# Altium PCB air qulity monitor with air purifire.PcbDoc
Units mil, origin at the board's own origin, x right, y up, seen from the top; angles counter-clockwise.
Board outline 3850 x 2015 mil, 2 copper layers (Top Layer, Bottom Layer); 35 components, 27 nets, 122 pads, 19 vias.
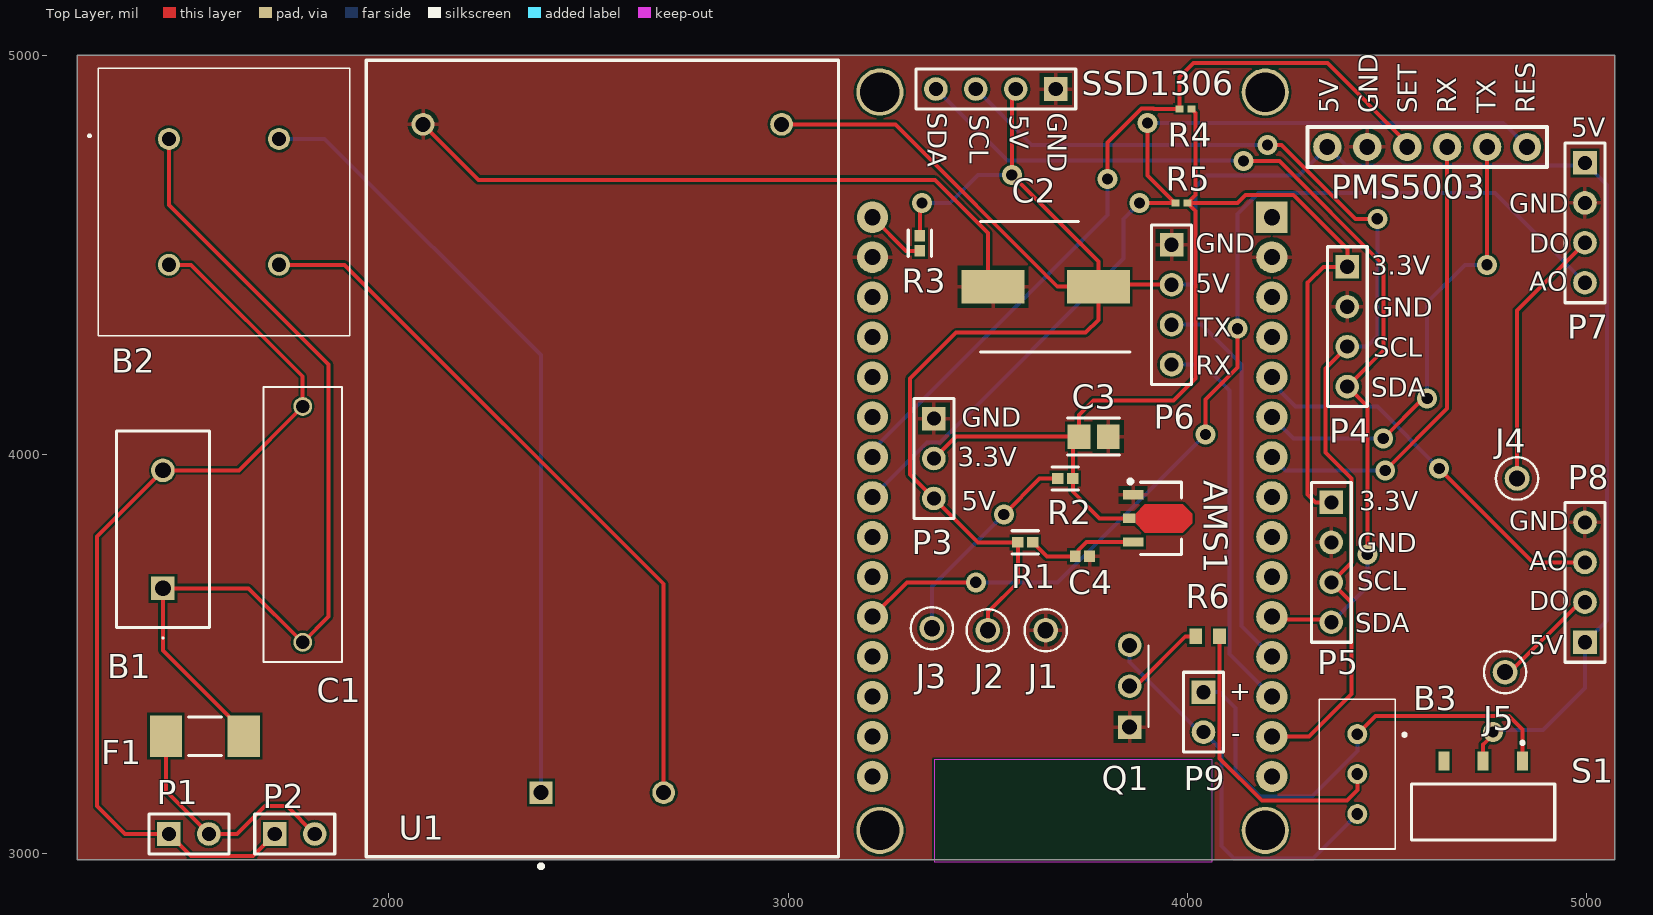
[diagram p0: Top Layer view]
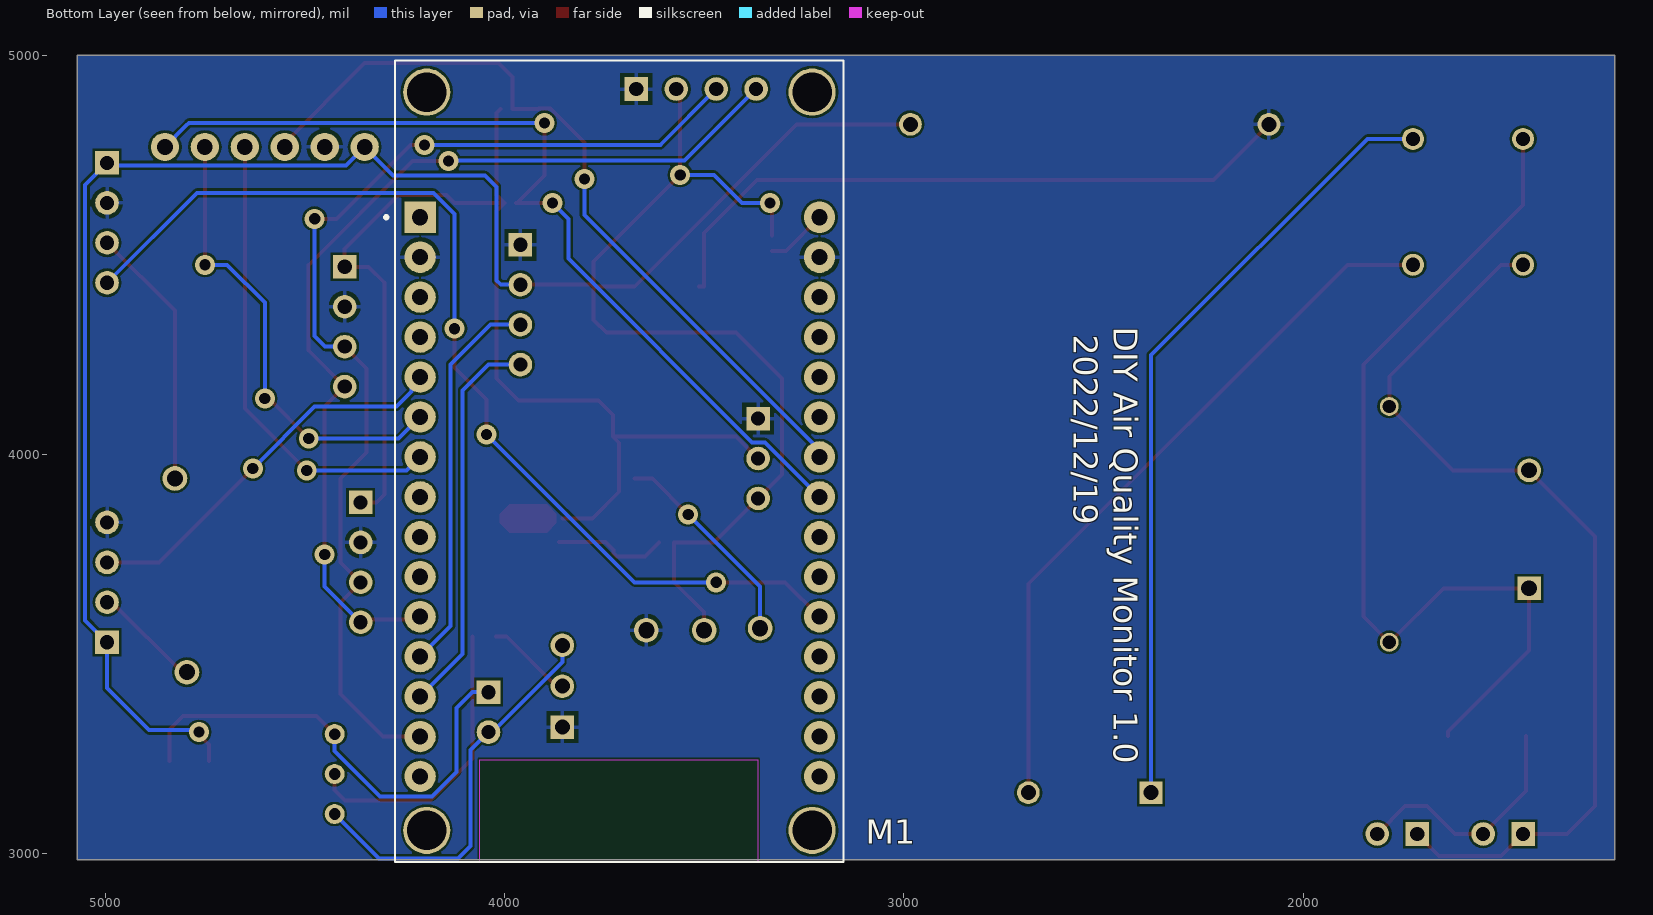
[diagram p1: Bottom Layer view, seen from below]

## Layer stack, top to bottom
Top Solder: solder mask 0.4, Solder Resist, Dk 3.5
Top Layer: signal copper 1.4
Dielectric 1: dielectric 12.6, FR-4, Dk 4.8
Bottom Layer: signal copper 1.4
Bottom Solder: solder mask 0.4, Solder Resist, Dk 3.5

## Board outline
1220,2985 5070,2985 5070,5000 1220,5000

## Design rules (kind name [scope] priority, off if disabled: settings)
Clearance [All] p1: gap=5.98 ignorepadtopadclearanceinfootprint=FALSE
MinimumSolderMaskSliver [All] p1: minsoldermaskwidth=0.98
PolygonConnect [All] p1: connectstyle=Relief reliefconductorwidth=10 reliefentries=4 polygonreliefangle="90 Angle" airgapwidth=10
RoutingVias [All] p1: holewidth=28 width=50 viastyle="Through Hole" minholewidth=28 minwidth=50 maxholewidth=28 maxwidth=50
SilkToSilkClearance [All] p1: silktosilkclearance=1
SilkToSolderMaskClearance [IsPad] p1: minsilkscreentomaskgap=5 clearancetoexposedcopper=TRUE
SolderMaskExpansion [All] p1: expansion=4.02
Width [All] p1: maxlimit=12.01 minlimit=5.98 preferedwidth=10
27 further rules are at their usual default settings.

## Components (designator, comment, footprint, x,y, rotation, side; value= is the part's Value field where it differs from the comment)
AMS1 "IC1" SOT89-150P350X150-3N 3925,3840 r0 top
B1 "10D561K" 10D561K 1435,3665 r90 top
B2 "UU9.8Y-10MH" UU98Y10MH 1450,4789.96 r180 top
B3 "3296X-1-103" 3296X1223LF 4425,3200 r180 top
C1 "0.1uF" MPX-104K275VAC-C-D2 1785,3825 r90 top
C2 "UUR1C221MNL1GS" CAPAE830X1050N 3645,4420 r180 top
C3 "22uF" FP-GRM219-0_2-0_15-IPC_A 3765,4045 r0 top
C4 "10uF" CAPC1005X70N 3736.89,3745 r180 top
F1 "S6125-M2-0.5A" CAPC6125X25N 1540,3295 r0 top
J1 "5004" FP-5004-MFG 3645,3560 r0 top
J2 "5004" FP-5004-MFG 3500,3560 r0 top
J3 "5004" FP-5004-MFG 3360,3565 r0 top
J4 "5004" FP-5004-MFG 4825,3940 r0 top
J5 "5004" FP-5004-MFG 4795,3455 r0 top
M1 "ESP32-WROOM-32" ESP32-DEVKIT-V1 3735,3990 r180 bottom
P1 "AC Current suppy pin Header 2" HDR1X2 1450,3050 r0 top
P2 "uv lamp connect pin Header 2" HDR1X2 1715,3050 r0 top
P3 "Header 3" HDR1X3 3365,4090 r270 top
P4 "Si7021 Sensor Header" HDR1X4 4400,4470 r270 top
P5 "SGP30 Sensor Header" HDR1X4 4360,3880 r270 top
P6 "ZE08-CH2O sensor Header" HDR1X4 3960,4525 r270 top
P7 "MQ7 sensor Header" HDR1X4 4995,4730 r270 top
P8 "MQ131 sensor Header" HDR1X4 4995,3530 r90 top
P9 "5V FAN Header 2" HDR1X2 4040,3405 r270 top
PMS5003 "PMS5003 PM2.5 Sensor" "PMS5003 PM2.5 Sensor" 4600,4770 r90 top (schematic designator "PMS5003 PM2.5 Sensor")
Q1 "2SC1384-TA" 2SC1384-TA 3855,3317.64 r90 top
R1 "0R" FP-RC0402-0_4-IPC_A 3593.84,3780 r0 top
R2 "0R" FP-RC0402-0_4-IPC_A 3693.84,3940 r180 top
R3 "0R" FP-RC0402-0_4-IPC_A 3330,4528.84 r270 top
R4 "10kΩ" RESC1005X40X25LL05T10 3995,4865 r0 top value=10kO
R5 "10kΩ" RESC1005X40X25LL05T10 3984.76,4630 r0 top value=10kO
R6 "RC0603FR-073K3L" RESC1608X55X25ML10T15 4050.47,3545 r0 top
S1 "SK-3245S-L1-A" SK3245SL1A 4740,3105 r180 top
SSD1306 "Display" HDR1X4 3670,4915 r180 top
U1 "HLK-10M05" FP-HLK-10M05-MFG 2535,3990 r90 top

## Footprints (in the part's own frame and the unit in brackets; to place one, negate y for a bottom-side part, rotate by r counter-clockwise, add the part's x,y. Pads: shape width x height; smd on the part's side, far side on the other; paste and mask are expansions set on the pad)
2SC1384-TA [mm]
  rect 1.493x1.493 hole 0.96: 1(0,0)
  round 1.493 hole 0.96: 2(2.6,0) 3(5.2,0)
  silkscreen extent 0,-1.2 5.2,-1.2
10D561K [mm]
  rect 1.5x1.5 hole 1: 1(0,0)
  round 1.5 hole 1: 2(7.5,0)
  silkscreen extent -3.2,-2.95 10,2.95, body extent -2.5,-2.95 10,2.95, height 15.6
3296X1223LF [mm]
  round 1.269 hole 0.74: 1(0,-2.54) 2(0,0) 3(0,2.54)
  silkscreen extent -3.1,-4.76 2.41,4.76, body extent -2.03,-4.83 2.8,6.22, height 10.03
CAPAE830X1050N [mm]
  rect 4x2.15 smd: 1(-3.35,0) 2(3.35,0)
  silkscreen extent -5.35,-4.15 4.15,4.15, body extent -4.65,-4.32 4.65,4.18, height 10.5
CAPC1005X70N [mm]
  rect 0.69x0.72 smd: 1(-0.46,0) 2(0.46,0)
  body extent -0.5,-0.25 0.5,0.25, height 0.7
CAPC6125X25N [mm] "Chip Capacitor, 2-Leads, Body 6.10x2.50mm, IPC Medium Density"
  rect 2.05x2.65 smd: 1(-2.475,0) 2(2.475,0)
  silkscreen extent -1.05,-1.22 1.05,1.23, body extent -3.15,-1.3 3.15,1.3, height 2.5
ESP32-DEVKIT-V1 [mm]
  rect 2x2 hole 1.02: 1(-12.098,15.341)
  round 2 hole 1.02: 2(-12.098,12.801) 3(-12.098,10.261) 4(-12.098,7.721) 5(-12.098,5.181) 6(-12.098,2.641) 7(-12.098,0.101) 8(-12.098,-2.439) 9(-12.098,-4.979) 10(-12.098,-7.519) 11(-12.098,-10.059) 12(-12.098,-12.599) 13(-12.098,-15.139) 14(-12.098,-17.679) 15(-12.098,-20.219) 16(13.302,-20.219) 17(13.302,-17.679) 18(13.302,-15.139) 19(13.302,-12.599) 20(13.302,-10.059) 21(13.302,-7.519) 22(13.302,-4.979) 23(13.302,-2.439) 24(13.302,0.101) 25(13.302,2.641) 26(13.302,5.181) 27(13.302,7.721) 28(13.302,10.261) 29(13.302,12.801) 30(13.302,15.341)
  round 3 hole 2.517 unplated: ""(-11.678,-23.649) ""(-11.678,23.301) ""(12.832,-23.649) ""(12.832,23.301)
  Keep-Out Layer region: 9.382,-25.649 -8.308,-25.649 -8.308,-19.159 9.382,-19.159
  Keep-Out Layer region: 9.382,-25.649 -8.308,-25.649 -8.308,-19.159 9.382,-19.159
  Keep-Out Layer region: 9.382,-25.649 -8.308,-25.649 -8.308,-19.159 9.382,-19.159
  silkscreen extent -14.35,-25.65 14.83,25.3, body extent -13.5,-25.63 15,25.3, height 7.2
FP-5004-MFG [mm]
  round 1.57 hole 1.02 paste-1000 mask+0: 1(0,0)
  silkscreen extent -1.35,-1.34 1.35,1.34, body extent -1.45,-1.45 1.45,1.45, height 0.25
FP-GRM219-0_2-0_15-IPC_A [mil]
  rect 57.27x61.27 smd paste+0 mask+0: 1(-36.45,0) 2(36.45,0)
  silkscreen extent -65,-46 65,46, body extent -85,-50 85,50, height 10
FP-HLK-10M05-MFG [mm]
  rect 1.45x1.45 hole 0.95 paste-1000 mask+0: 1(-21.25,3.9)
  round 1.45 hole 0.95 paste-1000 mask+0: 2(-21.25,-3.9) 3(21.25,11.4) 4(21.25,-11.4)
  silkscreen extent -26.05,-15.01 25.33,15.01, body extent -25.43,-15.11 25.43,15.11, height 0.25
FP-RC0402-0_4-IPC_A [mil]
  rect 28.16x26.48 smd paste+0 mask+0: 1(-18.84,0) 2(18.84,0)
  silkscreen extent -33,-29 33,29, body extent -41,-21 41,21, height 10
HDR1X2 [mm] "Connector; Header; 2 Position"
  rect 1.5x1.5 hole 0.9: 1(0,0)
  round 1.5 hole 0.9: 2(2.54,0)
  silkscreen extent -1.27,-1.27 3.81,1.27
HDR1X3 [mm] "Connector; Header; 3 Position"
  rect 1.5x1.5 hole 0.9: 1(0,0)
  round 1.5 hole 0.9: 2(2.54,0) 3(5.08,0)
  silkscreen extent -1.27,-1.27 6.35,1.27
HDR1X4 [mm] "Connector; Header; 4 Position"
  rect 1.5x1.5 hole 0.9: 1(0,0)
  round 1.5 hole 0.9: 2(2.54,0) 3(5.08,0) 4(7.62,0)
  silkscreen extent -1.27,-1.27 8.89,1.27
MPX-104K275VAC-C-D2 [mm]
  round 1.2 hole 0.85: 1(-7.5,0) 2(7.5,0)
  silkscreen extent -8.75,-2.5 8.75,2.5, body extent -8.75,-2.5 8.75,2.5, height 12
"PMS5003 PM2.5 Sensor" [mm] "PMS5003 PM2.5 Sensor"
  round 1.8 hole 1: GND(0,3.81) RESET(0,-6.35) RX(0,-1.27) SET(0,1.27) TX(0,-3.81) VCC(0,6.35)
  silkscreen extent -1.27,-7.62 1.27,7.62, body extent -1.27,-7.62 1.27,7.62, height 8.5
RESC1005X40X25LL05T10 [mm] "Chip Resistor, 2-Leads, Body 1.00x0.50mm, IPC High Density"
  rect 0.5x0.45 smd: 1(-0.375,0) 2(0.375,0)
  body extent -0.53,-0.27 0.53,0.28, height 0.4
RESC1608X55X25ML10T15 [mm] "Chip Resistor, 2-Leads, Body 1.60x0.80mm, IPC Low Density"
  rect 0.8x1 smd: 1(-0.75,0) 2(0.75,0)
  body extent -0.85,-0.45 0.85,0.45, height 0.55
SK3245SL1A [mm]
  rect 0.7x1.2 smd: 1(-2.5,-3.25) 2(0,-3.25) 3(2.5,-3.25)
  silkscreen extent -4.55,-4.5 4.55,1.78, body extent -4.55,-3.62 4.55,3.88, height 3.2
SOT89-150P350X150-3N [mm] "SOT89, 3-Leads, Body 4.50x2.50mm, Pitch 1.50mm, Lead Span 3.5mm, IPC Medium Density"
  rect 1.3x0.6 smd: 1(-1.55,1.5) 3(-1.55,-1.5)
  rect 0.8x0.6 smd: 2(-1.8,0)
  Top Layer region: -1.4,0.3 -0.8,0.9 1.6,0.9 2.2,0.3 2.2,-0.3 1.6,-0.9 -0.8,-0.9 -1.4,-0.3
  silkscreen extent -1.85,-2.3 1.53,2.47, body extent -2.02,-2.27 2.22,2.27, height 1.5
UU98Y10MH [mm]
  round 1.4 hole 0.9: 1(0,0) 2(-7,0) 3(-7,8) 4(0,8)
  silkscreen extent -11.5,-4.5 5.1,12.5, body extent -11.5,-4.5 4.5,12.5, height 14.1

## Part data
AMS1: library part IC?, "75dB@(120Hz) 1A 1.25V@(1A) ±125?@(Tj) Fixed 3.3V~3.3V Positive 1 20V SOT-89 Linear Voltage Regulators (LDO) ROHS", LCSC Part #=C2904742, Manufacturer=YONGYUTAI, Mfr. Part #=AMS1117-3.3, Package=SOT-89, Datasheet=https://datasheet.lcsc.com/lcsc/2110121330_YONGYUTAI-AMS1117-3-3_C2904742.pdf
B1: "920V 42.3J 180pF@1kHz 460V 350V 504V~616V 2.5kA Plugin Varistors ROHS", LCSC Part #=C113236, Manufacturer="Hongzhi Elec", Package=Plugin, Datasheet=https://datasheet.lcsc.com/lcsc/1811141751_Hongzhi-Elec-10D561K_C113236.pdf, Mfr. Part #=10D561K
B2: "Common Mode Chokes / Filters Power Line 10mH @ 1kHz 500mA Through Hole RoHS", Manufacturer_Name="Guangdong Fenghua Advanced Tech", Datasheet Link=https://datasheet.lcsc.com/szlcsc/Guangdong-Fenghua-Advanced-Tech-UU9-8Y-10mH_C75192.pdf, Geometry.Height=14mm, Manufacturer_Part_Number=UU9.8Y-10MH
B3: "3296X side adj cermet trimmer,10K 10mm", Manufacturer_Name=Bourns, Mouser Part Number=652-3296X-1-103, Arrow Part Number=3296X-1-103, Arrow Price/Stock=https://www.arrow.com/en/products/3296x-1-103/bourns, Datasheet Link=https://componentsearchengine.com/Datasheets/1/3296X-1-103.pdf, Geometry.Height=10mm, Manufacturer_Part_Number=3296X-1-103, Mouser Price/Stock=https://www.mouser.co.uk/ProductDetail/Bourns/3296X-1-103?qs=1WK3E8%252B1vGCDWmrofBGMvw%3D%3D
C1: library part MPX-104K275VAC-C-D2, "0.1uF ±10% -40?~+110? X2 275VAC Radial Leaded,P=15mm Suppression Capacitors ROHS", LCSC Part #=C3249976, Manufacturer=CORETONG, Package="Radial Leaded,P=15mm", Datasheet=https://datasheet.lcsc.com/lcsc/2207051802_CORETONG-MPX-104K275VAC-C-D2_C3249976.pdf, Mfr. Part #=MPX-104K275VAC-C-D2
C2: "Nichicon 220uF 16V dc Aluminium Electrolytic Capacitor, Surface Mount 8 (Dia.) x 10mm +85C 8mm", Manufacturer_Name=Nichicon, Mouser Part Number=647-UUR1C221MNL1GS, Arrow Part Number=UUR1C221MNL1GS, Arrow Price/Stock=https://www.arrow.com/en/products/uur1c221mnl1gs/nichicon, Datasheet Link=http://www.nichicon.co.jp/english/products/pdfs/e-uur.pdf, Geometry.Height=10.5mm, Manufacturer_Part_Number=UUR1C221MNL1GS, Mouser Price/Stock=https://www.mouser.co.uk/ProductDetail/Nichicon/UUR1C221MNL1GS?qs=%252BzEQ4sV6YNnDp6ENSFi1fw%3D%3D
C3: library part CMP-06035-056251-1, "Chip Multilayer Ceramic Capacitors for General Purpose, 0805, 22uF, X5R, 15%, 20%, 16V", LCSC Part #=C162295, Manufacturer="Murata Electronics", Mfr. Part #=GRM219R61C226ME15L, Package=0805, Datasheet=https://datasheet.lcsc.com/lcsc/1811141821_Murata-Electronics-GRM219R61C226ME15L_C162295.pdf
C4: library part CL05A106MQ5NUNC, "6.3V 10uF X5R ±20% 0402 Multilayer Ceramic Capacitors MLCC - SMD/SMT ROHS", LCSC Part #=C15525, Manufacturer="Samsung Electro-Mechanics", Package=0402, Datasheet Link=https://datasheet.datasheetarchive.com/originals/distributors/Datasheets-DGA10/2406160.pdf, Mfr. Part #=CL05A106MQ5NUNC
F1: "SMD Fuses ROHS", LCSC Part #=C845172, Manufacturer="SART(Nanjing Sart Tech)", Package=SMD, Datasheet=https://datasheet.lcsc.com/lcsc/2201242130_SART-Nanjing-Sart-Tech-S6125-M2-0-5A_C845172.pdf, Mfr. Part #=S6125-M2-0.5A
J1 J2 J3 J4 J5: library part CMP-2000-05575-2, "PC TEST POINT MINIATURE YELLOW", LCSC Part #=C2906762, Manufacturer=Keystone, ComponentLink2Description=Datasheet, ComponentLink2URL=https://www.keyelco.com/product-pdf.cfm?p=1313, Datasheet=https://datasheet.lcsc.com/lcsc/2201121200_Keystone-5004_C2906762.pdf, Mfr. Part #=5004, Package=5004
M1: library part ESP32-DEVKIT-V1, "Dual core, Wi-Fi: 2.4 GHz up to 150 Mbits/s,BLE (Bluetooth Low Energy) and legacy Bluetooth, 32 bits, Up to 240 MHz"
P1 P2 P9: library part "Header 2", "Header, 2-Pin", LatestRevisionDate=17-Jul-2002, LatestRevisionNote="Re-released for DXP Platform.", Publisher="Altium Limited"
P3: "Header, 3-Pin", LatestRevisionDate=17-Jul-2002, LatestRevisionNote="Re-released for DXP Platform.", Publisher="Altium Limited"
P4 P5 P6 P7 P8 SSD1306: library part "Header 4", "Header, 4-Pin", LatestRevisionDate=17-Jul-2002, LatestRevisionNote="Re-released for DXP Platform.", Publisher="Altium Limited"
Q1: "Bipolar Transistors - BJT NPN Si Transistor Epitaxial", LCSC Part #=C2910422, Manufacturer="Jiangsu Changjing Electronics Technology Co., Ltd.", Datasheet=https://datasheet.lcsc.com/lcsc/2204131745_Jiangsu-Changjing-Electronics-Technology-Co---Ltd--2SC1384-TA_C2910422.pdf, Geometry.Height=5.33mm, Mfr. Part #=2SC1384-TA
R1 R2 R3: library part CMP-2002-07342-2, "RES SMD 0 OHM JUMPER 1/16W 0402", LCSC Part #=C106231, Manufacturer=Yageo, Mfr. Part #=RC0402FR-070RL, Package=0402, Datasheet=https://www.lcsc.com/product-detail/Chip-Resistor-Surface-Mount_YAGEO-RC0402FR-070RL_C106231.html
R4 R5: library part CMP-2002-07353-1, "62.5mW 50V ±100ppm/? ±1% -55?~+155? 10kO 0402 Chip Resistor - Surface Mount ROHS", LCSC Part #=C60490, Manufacturer="Yageo / Phycomp", Mfr. Part #=RC0402FR-0710KL, Package=0402, Datasheet=https://datasheet.lcsc.com/lcsc/1809301715_YAGEO-RC0402FR-0710KL_C60490.pdf
R6: library part CMP-1012-00567-2, "Chip Resistor, 3.3 KOhm, +/- 1%, 0.1 W, -55 to 155 degC, 0603 (1608 Metric), RoHS, Tape and Reel", Case/Package=0603, Case Code (Metric)=1608, Manufacturer=Yageo, Max Operating Temperature=155degC, Max Power Dissipation=100mW, Min Operating Temperature=-55degC, Package Description="2-Pin Surface Mount Device, Body 1.6 x 0.8 mm", Package Quantity=1, Resistance=3.3KOhm, Temperature Coefficient=100ppm/degreesC, Tolerance=1%, Voltage Rating=50V, Case Code (Imperial)=0603, Composition=ThickFilm, Datasheet URL=http://www.yageo.com/NewPortal/yageodocoutput?fileName=/pdf/R-Chip/PYu-RC_Group_51_RoHS_L_5.pdf, Datasheet Version="Rev. 5, 10/2016", Depth=0.8mm, Height=0.45mm, Lead Free=LeadFree, Length=1.6mm, Manufacturer URL=http://www.yageo.com/, Military Standard=Not, Number of Pins=2, Number of Terminations=2, Package Reference=0603, Packaging=TapeandReel, Power Rating=100mW, REACH SVHC=NoSVHC, RoHSCompliant=true, Termination=SMD/SMT, Voltage Rating (DC)=50V, Width=0.8mm
S1: "Toggle switch, horizontal stick two gears 3 feet, double row of high temperature salt fog resistance 24 hours,9.0x3.5x3.2, black handle height 2.0mm", Manufacturer_Name="XKB Connectivity", Datasheet Link=http://www.helloxkb.com/public/images/pdf/SK-3245S-X-X.pdf, Geometry.Height=3.65mm, Manufacturer_Part_Number=SK-3245S-L1-A
U1: library part CMP-218581-000001-1, "10W Ultra-Compact Power Module"

## Via types
v1: diameter 50, hole 28, Top Layer to Bottom Layer, 19 vias

## Nets (pads, with @x,y where several pads share a name; then routed paths per layer and width w, separated by ;. In a path a pad name is that pad's centre, name@x,y a point inside that pad or via, vN(x,y) a via of type N, cw(c..) or ccw(c..) an arc to the next point about the centre after c; other vN are vias at no path point)
3.3V: AMS1.2 C3.1 P3.2 P4.1 P5.1 R2.1 R4.2 R5.2 | length 3003.3
  Top Layer w10: P3.2 3420,4045 C3.1 ; AMS1.2 3780,3840 3712.68,3907.32 R2.1 3712.68,4029.13 C3.1 ; R4.2 4020,4854.76 4020,4649.49 R5.2@4000.51,4630 ; P5.1 4320,3880 4300,3900 4300,4430 4340,4470 P4.1 4400,4515 4265,4650 4145,4650 4125,4630 R5.2@4000.51,4630 ; C3.1 3728.55,4098.55 3765,4135 3965,4135 4020,4190 4019.76,4190 4019.76,4609.76 R5.2 R5.2@4000.51,4630
5V: C2.1 J2.1 P3.3 P6.2 P7.1 P8.1 PMS5003.VCC R1.1 R3.1 S1.2 SSD1306.2 U1.4 | length 6576.7
  Top Layer w10: U1.4 3268.39,4826.61 3675,4420 C2.1 ; R3.1 3330,4625 v1(3335,4630) ; J2.1 3500.91,3560.91 3500.91,3605.91 3575,3680 R1.1 3475,3780 P3.3 3305,3950 3305,4190 3420,4305 3745,4305 3776.89,4336.89 C2.1 ; SSD1306.2 3560,4905 v1(3560,4700) 3776.89,4483.11 C2.1 ; P6.2 3781.89,4425 C2.1 ; S1.2 4740,3273.43 4765,3298.43 v1(4765,3305)
  Bottom Layer w10: v1(3335,4630) 3405,4630 3475,4700 v1(3560,4700) ; P6.2 4008.83,4425 4020,4436.17 4020,4670 4049.02,4699.02 4279.02,4699.02 PMS5003.VCC 4396.42,4723.58 4988.58,4723.58 P7.1 5050,4675 5050,3585 P8.1 4995,3415 4890,3310 4770,3310 v1(4765,3305)
DOUT1: J4.1 P7.3 | length 660.4
  Top Layer w10: J4.1 4825,4360 P7.3
DOUT2: J5.1 P8.2 | length 272.5
  Top Layer w10: J5.1 4807.5,3455 4982.5,3630 P8.2
GND: AMS1.1 C2.2 C3.2 C4.1 J1.1 M1.2 M1.29 P3.1 P4.2 P5.2 P6.1 P7.2 P8.4 PMS5003.GND Q1.1 SSD1306.1 U1.3 | length 1674.4
  Top Layer w10: U1.3 2225.33,4687.46 3367.54,4687.46 3500,4555 3500,4420 C2.2
NetAMS1_3: AMS1.3 C4.2 R1.2 | length 284.8
  Top Layer w10: R1.2 3613.53,3780 3648.53,3745 C4.2 3727.36,3753.58 3727.36,3760.65 3747.66,3780.94 AMS1.3
NetB1_1: B1.1 B2.1 C1.1 F1.2 | length 2312.7
  Top Layer w10: B2.1 1450,4625 1850,4225 1850,3594.72 C1.1 1649.72,3665 B1.1 1435,3509.25 1637.44,3306.81 F1.2
NetB1_2: B1.2 B2.4 C1.2 P1.1 P2.1 | length 2370.2
  Top Layer w10: B2.4 1505,4475 1785,4195 C1.2 1625,3960.28 B1.2 1270,3795.28 1270,3120 1340,3050 P1.1 1505,2995 1660,2995 P2.1
NetB2_2: B2.2 U1.1 | length 1975.3
  Bottom Layer w10: B2.2 1840.04,4789.96 2381.46,4248.54 U1.1
NetB2_3: B2.3 U1.2 | length 1816.8
  Top Layer w10: B2.3 1890,4475 2688.54,3676.46 U1.2
NetB3_1: B3.1 P9.1 S1.1 | length 1201.1
  Top Layer w10: B3.1 4470,3345 4805,3345 4838.43,3311.57 S1.1
  Bottom Layer w10: P9.1 4080,3405 4120,3365 4120,3205 4181.38,3143.62 4311.02,3143.62 4425,3257.6 B3.1
NetB3_2: B3.2 R6.2 | length 744.6
  Top Layer w10: R6.2 4080.51,3544.49 4080.51,3239.49 4185.86,3134.14 4399.14,3134.14 4425,3160 B3.2
NetB3_3: B3.3 P9.2 Q1.3 | length 1012.4
  Bottom Layer w10: Q1.3 3855,3480 4020.61,3314.39 4030.61,3314.39 P9.2 4085,3260 4085,3020 4116.1,2988.9 4313.9,2988.9 B3.3 B3.3@4415,3100
NetF1_1: F1.1 P1.2 P2.2 | length 612.5
  Top Layer w10: F1.1 1442.56,3157.44 P1.2 1620,3050 1690,3120 1745,3120 P2.2
NetJ3_1: J3.1 R2.2 | length 531.8
  Top Layer w10: v1(3540,3850) 3630,3940 R2.2
  Bottom Layer w10: J3.1 3360,3670 v1(3540,3850)
NetM1_5: M1.5 P8.3 | length 1014
  Top Layer w10: v1(4630,3965) 4865,3730 P8.3
  Bottom Layer w10: M1.5@4206.3,4168.98 4232.32,4195 4232.32,4157.68 4270,4120 4475,4120 v1(4630,3965)
NetM1_6: M1.6 PMS5003.TX | length 1176.8
  Top Layer w10: v1(4490,4040) 4590,4140 v1(4600,4140) ; v1(4750,4475) PMS5003.TX
  Bottom Layer w10: M1.6 4265.28,4040 v1(4490,4040) ; v1(4600,4140) 4600,4380 4695,4475 v1(4750,4475)
NetM1_7: M1.7 PMS5003.RX | length 1172
  Top Layer w10: v1(4495,3960) 4650,4115 PMS5003.RX
  Bottom Layer w10: M1.7 4245.28,3960 v1(4495,3960)
NetM1_12: M1.12 P6.3 | length 979
  Bottom Layer w10: P6.3 4035,4325 4135,4225 4135,3570.28 M1.12
NetM1_13: M1.13 P6.4 | length 982
  Bottom Layer w10: P6.4 4040,4225 4105,4160 4105,3500.28 M1.13
NetM1_20: M1.20 P7.4 | length 2592.9
  Top Layer w10: M1.20 3297.32,3680 v1(3470,3680) ; v1(4045,4050) 4045,4137.4 4125,4217.4 v1(4125,4315)
  Bottom Layer w10: v1(3470,3680) 3675,3680 v1(4045,4050) ; v1(4125,4315) 4125,4601.95 4178.05,4655 4770,4655 P7.4
NetM1_23: M1.23 PMS5003.RESET R5.1 | length 2326.3
  Top Layer w10: v1(3880,4630) R5.1@3969.02,4630 ; v1(3900,4830) 3900,4699.02 R5.1@3969.02,4630 ; R5.1@3970.98,4630 R5.1 R5.1@3969.02,4630
  Bottom Layer w10: M1.23 3347.83,4030.51 3380.1,4030.51 3840,4490.41 3840,4590 v1(3880,4630) ; v1(3900,4830) 4790,4830 4796.79,4823.21 PMS5003.RESET
NetM1_24: M1.24 PMS5003.SET R4.1 | length 2003.7
  Top Layer w10: v1(3800,4690) 3800,4780.89 3885.09,4865.98 3914.91,4865.98 3915.89,4865 R4.1 3980.24,4944.94 4015.29,4980 4350,4980 4550,4780 PMS5003.SET
  Bottom Layer w10: M1.24 3211.3,4010.89 3800,4599.59 v1(3800,4690)
NetM1_30: M1.30 R3.2 | length 153.5
  Top Layer w10: M1.30 3295.28,4510 R3.2
NetQ1_2: Q1.2 R6.1 | length 217.7
  Top Layer w10: Q1.2 3858.44,3423.44 3873.44,3423.44 3995,3545 R6.1
SCL: M1.14 P4.3 P5.3 SSD1306.3 | length 2723
  Top Layer w10: v1(4200,4775) 4235,4775 4420,4590 v1(4475,4590) ; M1.14 4303.98,3293.98 4410,3400 4410,3630 P5.3 4410,3730 4410,3940 4345,4005 4345,4215 P4.3
  Bottom Layer w10: SSD1306.3 3610,4775 v1(4200,4775) ; P4.3 4448.83,4270 4475,4296.17 v1(4475,4590)
SDA: M1.11 P4.4 P5.4 SSD1306.4 | length 2460.3
  Top Layer w10: v1(4140,4735) 4230,4735 4490,4475 4490,4260 P4.4 4450,4120 v1(4450,3750) ; M1.11 4218.29,3586.99 4353.01,3586.99 P5.4
  Bottom Layer w10: SSD1306.4 3549.02,4735.98 4139.02,4735.98 v1(4140,4735) ; P5.4@4346.73,3580 P5.4 4450,3670 v1(4450,3750)
pads on no net: M1. M1.1 M1.3 M1.4 M1.8 M1.9 M1.10 M1.15 M1.16 M1.17 M1.18 M1.19 M1.21 M1.22 M1.25 M1.26 M1.27 M1.28 S1.3

## Polygon pours and split planes (outlines as drawn)
GND on Bottom Layer "GND_L02_P008" (solid, pour order 8): 1220,2985 5070,2985 5070,5000 1220,5000
GND on Top Layer "GND_L01_P009" (solid, pour order 9): 1220,2985 5070,2985 5070,5000 1220,5000

## Silkscreen, mask and mechanical layers (free items; w line width, h text height)
Top Overlay:
  text "SDA" at 3350,4855 h47.24 r270
  text "GND" at 3650,4855 h47.24 r270
  text "SCL" at 3455,4850 h47.24 r270
  text "5V" at 3555,4850 h47.24 r270
  text "5V" at 4960,4795 h47.24
  text "GND" at 4805,4605 h47.24
  text "GND" at 4020,4505 h47.24
  text "DO" at 4855,4505 h47.24
  text "3.3V" at 4460,4450 h47.24
  text "AO" at 4855,4410 h47.24
  text "5V" at 4020,4405 h47.24
  text "GND" at 4465,4345 h47.24
  text "TX" at 4025,4295 h47.24
  text "SCL" at 4465,4245 h47.24
  text "RX" at 4020,4200 h47.24
  text "SDA" at 4460,4145 h47.24
  text "GND" at 3435,4070 h47.24
  text "3.3V" at 3425,3970 h47.24
  text "5V" at 3435,3860 h47.24
  text "3.3V" at 4430,3860 h47.24
  text "GND" at 4805,3810 h47.24
  text "GND" at 4425,3755 h47.24
  text "AO" at 4855,3710 h47.24
  text "SCL" at 4425,3660 h47.24
  text "DO" at 4855,3610 h47.24
  text "SDA" at 4420,3555 h47.24
  text "5V" at 4855,3500 h47.24
  text "+" at 4105,3385 h47.24
  text "-" at 4110,3280 h47.24
Bottom Overlay:
  text "DIY Air Quality Monitor 1.0" at 2475,4320 h60 r90
  text "2022/12/19" at 2575,4300 h60 r90
Mechanical 1:
  lines w10: 1084.01,3038.41 1104.01,2978.41 ; 1084.01,4943.41 1104.01,5003.41 ; 1094.01,2978.41 1114.01,2978.41 ; 1094.01,5003.41 1114.01,5003.41 ; 1104.01,3710 1104.01,2978.41 ; 1104.01,4271.83 1104.01,5003.41 ; 1124.01,3038.41 1104.01,2978.41 ; 1124.01,4943.41 1104.01,5003.41 ; 1219.09,2895 1219.09,2915 ; 1279.09,2885 1219.09,2905 ; 1279.09,2925 1219.09,2905 ; 2863.17,2905 1219.09,2905 ; 3425,2905 5069.09,2905 ; 5009.09,2885 5069.09,2905 ; 5009.09,2925 5069.09,2905 ; 5069.09,2895 5069.09,2915 ; 1220,2980 1220,4995 5070,4995 5070,2985 5065,2980 1220,2980
  text "2025 (mil)" at 1140,3720 h60 r90
  text "3850 (mil)" at 2873.17,2869.01 h60
Top Assembly:

## Text inside footprints (layer, text, board x,y; h text height)
PMS5003: Top Overlay "5V" at 4377.56,4854.65 h47.24 r90; Top Overlay "GND" at 4475.98,4854.65 h47.24 r90; Top Overlay "SET" at 4574.41,4854.65 h47.24 r90; Top Overlay "RX" at 4672.83,4854.65 h47.24 r90; Top Overlay "RES" at 4869.69,4854.65 h47.24 r90; Top Overlay "TX" at 4771.26,4854.65 h47.24 r90